# Altium PCB PCB1.PcbDoc
Units mil, origin at the board's own origin, x right, y up, seen from the top; angles counter-clockwise.
Board outline 4045 x 1495 mil, 2 copper layers (Top Layer, Bottom Layer); 17 components, 11 nets, 43 pads, 0 vias.
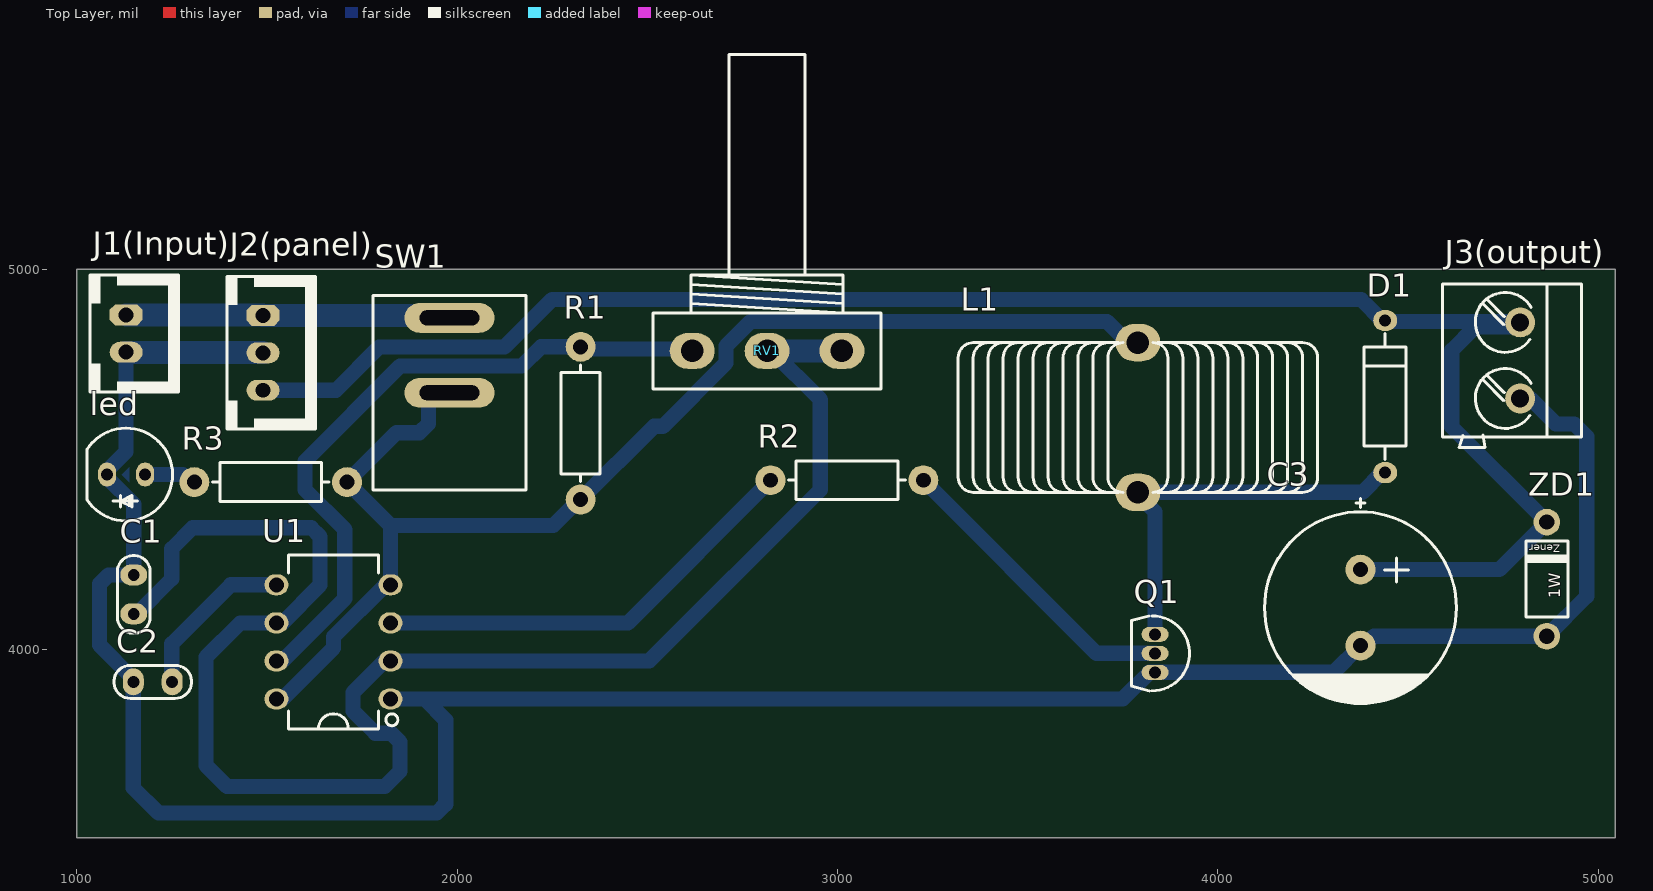
[diagram p0: Top Layer view]
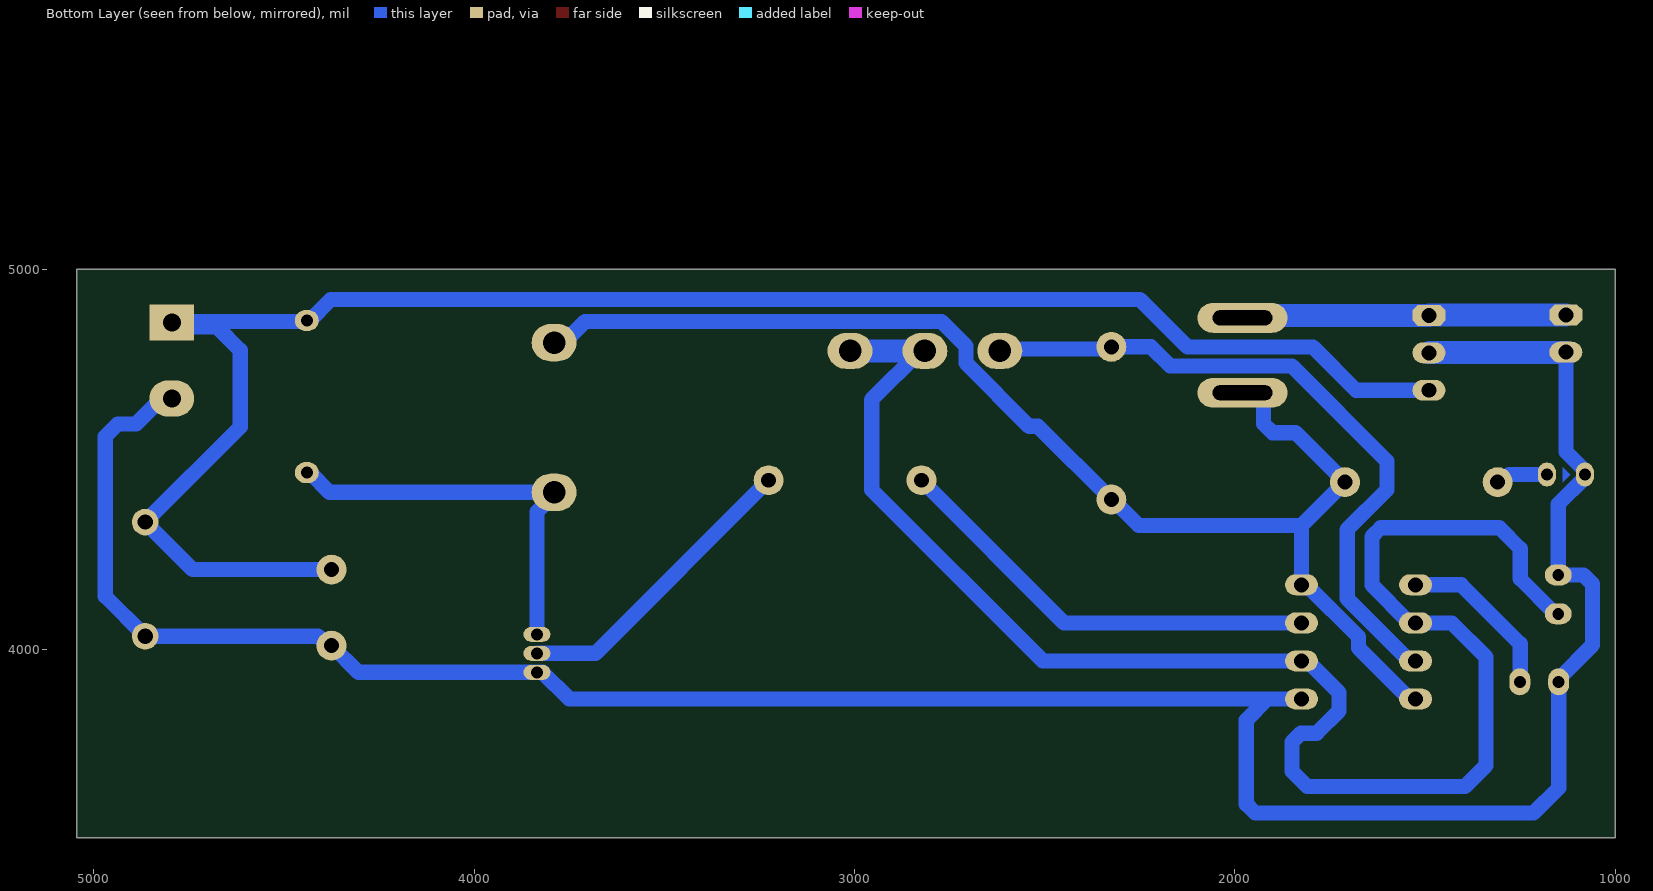
[diagram p1: Bottom Layer view, seen from below]
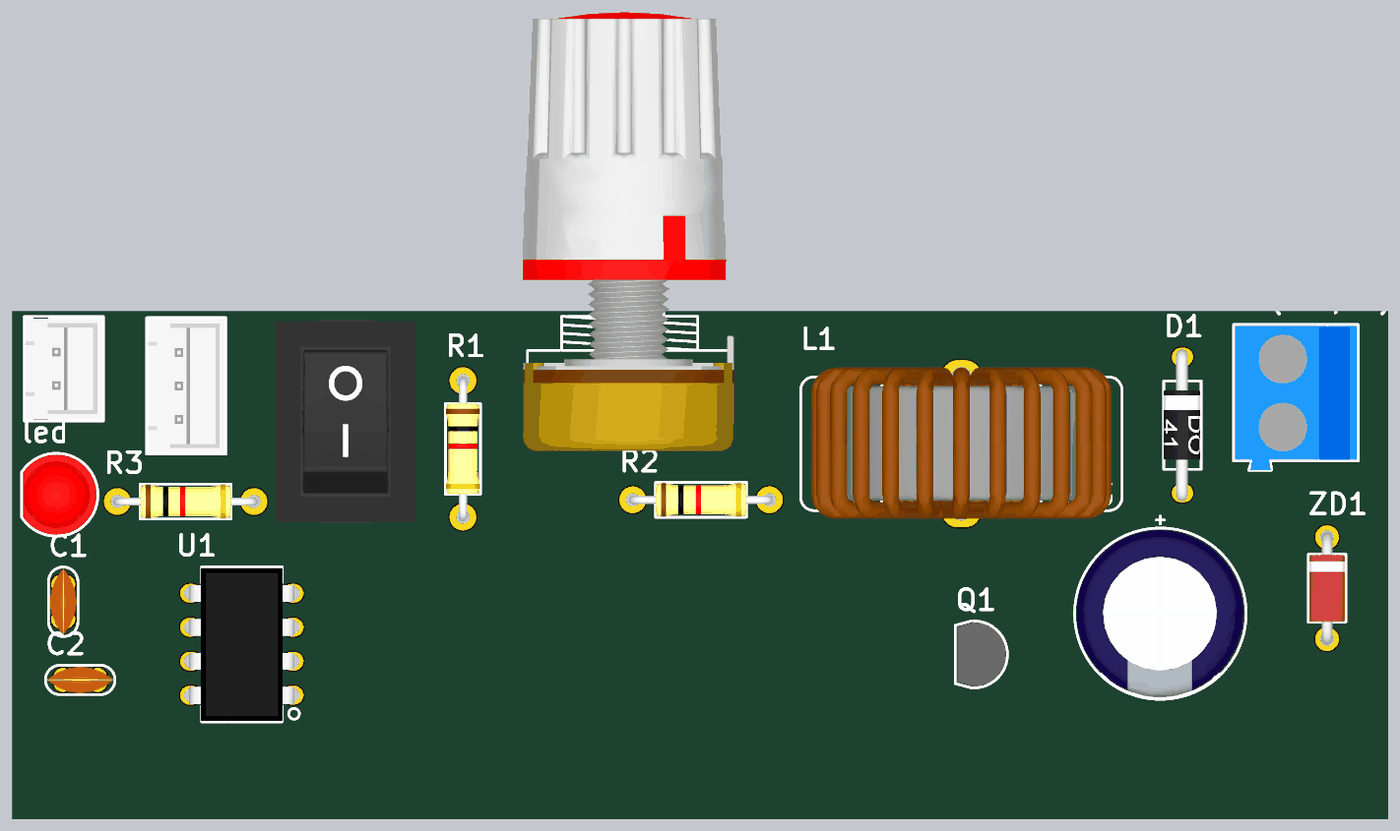
[diagram p2: 3D render of the assembled board from above, using the file's embedded part models]

## Layer stack, top to bottom
Top Solder: solder mask 0.4, Solder Resist, Dk 3.5
Top Layer: signal copper 1.4
Dielectric 1: dielectric 12.6, FR-4, Dk 4.8
Bottom Layer: signal copper 1.4
Bottom Solder: solder mask 0.4, Solder Resist, Dk 3.5

## Board outline
1000,3505 5045,3505 5045,5000 1000,5000

## Design rules (kind name [scope] priority, off if disabled: settings)
Clearance [All] p1: gap=10 ignorepadtopadclearanceinfootprint=FALSE
PolygonConnect [All] p1: connectstyle=Relief reliefconductorwidth=10 reliefentries=4 polygonreliefangle="90 Angle" airgapwidth=10
RoutingVias [All] p1: holewidth=28 width=50 viastyle="Through Hole" minholewidth=28 minwidth=50 maxholewidth=28 maxwidth=50
SolderMaskExpansion [All] p1: expansion=4 istentingtop=FALSE
Width [All] p1: maxlimit=60 minlimit=40 preferedwidth=50
30 further rules are at their usual default settings.

## Components (designator, comment, footprint, x,y, rotation, side; value= is the part's Value field where it differs from the comment)
C1 "470pF" C_CER_D5 1150,4145 r270 top
C2 "10nF" C_CER_D5 1200,3915 r0 top
C3 "0.1uF" C_EL_12X25 4375,4110 r270 top
D1 "1N4007" D_AX04_DO41 4440,4665 r90 top
J1(Input) "XH_2" XH_2 1130,4830.79 r270 top
J2(panel) "XH_3" XH_3 1490,4780 r270 top
J3(output) "CONN_TB2" TBB_2 4795,4760 r270 top
L1 "100uH" LTOR_25X10 3790,4610 r90 top
led "LED5MM_RED" LED5MM_RED 1130,4460 r180 top
Q1 "BC547" TO92_3 3835,3990 r270 top
R1 "1K" R025W_AX04 2325,4595 r270 top
R2 "330" R025W_AX04 3025,4445 r0 top
R3 "100" R025W_AX04 1510,4440 r0 top
RV1 "POT20K" VOL_R 2815,4785 r0 top
SW1 "ToggleSwitch" SWRCK_SPST_S_15X10 1980,4675 r270 top
U1 "LM555" DIP_8 1675,4020 r180 top
ZD1 "Diode Zener" "Diode 1W" 4865,4185 r90 top

## Footprints (in the part's own frame and the unit in brackets; to place one, negate y for a bottom-side part, rotate by r counter-clockwise, add the part's x,y. Pads: shape width x height; smd on the part's side, far side on the other; paste and mask are expansions set on the pad)
C_CER_D5 [mm] "CAP, CER, D:5mm, pitch: 2.5mm"
  oval 1.4x1.8 hole 0.8: 1(-1.3,0) 2(1.3,0)
  silkscreen extent -2.6,-1.1 2.6,1.1, body extent -2.46,-1 2.46,1, height 5.45
C_EL_12X25 [mm] "Cap Elec, D12.0X25.0H pitch: 5.0mm, RB.2/.5"
  round 2 hole 1: 1(-2.54,0) 2(2.54,0)
  silkscreen extent -7.3,-6.4 6.4,6.4, body extent -6.25,-6.27 6.25,6.21, height 25.8
D_AX04_DO41 [mm] "DIODE 0.4 INCH SPACING DO-41"
  oval 1.4x1.6 hole 0.8: 1(-5.08,0) 2(5.08,0)
  silkscreen extent -4.2,-1.4 4.2,1.4, body extent -5.68,-1.32 5.68,1.4, height 2.85
"Diode 1W" [mil]
  round 70 hole 40: 1(-150,0) 2(150,0)
  silkscreen extent -100,-55 100,55, body extent -166,-53 165,53, height 131
DIP_8 [mm] "DIP, pitch 2.54mm, 300mil Width"
  oval 1.6x1.4 / inner round 1.4 / far side oval 2.2x1.4 hole 1: 1(-3.81,3.81) 2(-3.81,1.27) 3(-3.81,-1.27) 4(-3.81,-3.81) 5(3.81,-3.81) 6(3.81,-1.27) 7(3.81,1.27) 8(3.81,3.81)
  silkscreen extent -4.3,-5.8 3,5.8, body extent -3.94,-5.7 3.94,5.73, height 4.19
LED5MM_RED [mm] "LED THD 5MM RED"
  oval 1.2x1.6 hole 0.8: 1(-1.27,0) 2(1.27,0)
  Bottom Layer region: -0.2,0.5 -0.2,-0.5 0.3,0
  silkscreen extent -3.1,-3.1 2.6,3.1, body extent -3,-3 2.5,3, height 9.14
LTOR_25X10 [mm] "INDUCTOR, TORIOD, 25.0X10.0mm"
  oval 2.5x3 hole 1.5: 1(-5,0) 2(5,0)
  silkscreen extent -5,-12 5,12, body extent -5.62,-11.21 5.7,11.21, height 23.03
R025W_AX04 [mm] "RESISTOR 1/4 WATT, AXIAL0.4"
  round 2 hole 1: 1(-5.1,0) 2(5.1,0)
  silkscreen extent -3.9,-1.3 3.9,1.3, body extent -5.38,-1.28 5.38,1.28, height 2.6
SWRCK_SPST_S_15X10 [mm] "SWITCH Rocker, SPST, Straight, 15x10"
  oval 2x6 hole 1 slot 4 at 90 deg: 1(-5,0) 2(0,0)
  silkscreen extent -6.5,-5.1 6.5,5.1, body extent -7.6,-5.25 7.6,5.25, height 13.1
TBB_2 [mm] "Terminal Block Blue"
  round 2 / inner round 2 / far side rect 2.4x3 hole 1.2: 1(-2.54,0)
  round 2 / inner round 2 / far side oval 2.4x3 hole 1.2: 2(2.54,0)
  silkscreen extent -5.1,-5.2 5.8,4.1, body extent -4.96,-5.08 5.78,3.99, height 12.52
TO92_3 [mm] "TO-92, SOT54"
  oval 1x1.8 hole 0.8 mask+0.1: 1(-1.27,0) 2(0,0) 3(1.27,0)
  silkscreen extent -2.5,-1.59 2.5,2.3, body extent -2.38,-1.45 2.38,2.18, height 7.82
VOL_R [mm] "VOULME RIGHT ANGLE"
  oval 3x2.4 hole 1.5: 1(-5,0) 2(0,0) 3(5,0)
  silkscreen extent -7.62,-2.54 7.62,19.78, body extent -10.76,-5 10.93,27.8, height 24.54
XH_2 [mm] "PW10-x-M, JST-BxB-XH-A pitch: 2.5mm, 3A/250v"
  oct 1.4x2.2 hole 1: 1(-1.25,0)
  oval 1.4x2.2 hole 1: 2(1.25,0)
  silkscreen extent -3.9,-2.4 3.9,3.5, body extent -3.75,-2.3 3.75,3.4, height 7
XH_3 [mm] "PW10-x-M, JST-BxB-XH-A pitch: 2.5mm, 3A/250v"
  oct 1.4x2.2 hole 1: 1(-2.5,0)
  oval 1.4x2.2 hole 1: 2(0,0) 3(2.5,0)
  silkscreen extent -5.1,-2.4 5.1,3.5, body extent -5,-2.3 5,3.4, height 7

## Part data
C1 C2: library part CAP_THD_CER, "CAP, THD, CER MULTI LAYER,", ASSEMBLY=ASSEMBLY, DESC="CAP, CER MULTI LAYER,", MANF=MANF, MANF_P#=MANF_PART#, PARAM2=50V, PRICE="100= 1$"
C3: library part CAP_THD_EL, "CAP, THD, ELEC,", ASSEMBLY=ASSEMBLY, DESC=DESCRIPTION, DIST#=MOUSER, MANF=MANF, MANF_P#=MANF_PART#, PARAM=20%, PARAM2=25V, PRICE="10= 5$"
D1: library part DIODE_THD, "DIODE, THD", ASSEMBLY=ASSEMBLY, DESC=DESCRIPTION, MANF=MANF, MANF_P#=1N4001, PARAM=100V, PARAM2=1A, PRICE=PRICE
J1(Input) J2(panel): "PW10-x-M, JST-BxB-XH-A pitch: 2.5mm, 3A/250v", MANF=JST, PARAM=3.0A, PARAM2=250v
  J1(Input): MANF_P#=B2B-XH-A
  J2(panel): MANF_P#=B3B-XH-A
J3(output): "CONN, TERMINAL BLOCK, 5.08mm pitch"
L1: library part IND_THD, "INDUCTOR, THD"
led: library part LED_THD_5MM_RED, "LED, THD, 5MM, RED", ASSEMBLY=ASSEMBLY, DESC=DESCRIPTION, MANF=MANF, MANF_P#=MANF_PART#, PARAM2=2.2V, PRICE=PRICE
Q1: library part NPN_BC547_TO92, "BJT, NPN, 45v, 0.1A, THD, TO92", MANF=FAIRCHILD, MANF_P#=BC547, PARAM="0.1A, Hfe110~800", PARAM2="45v, 500mW"
R1 R2 R3: library part RES_THD, "RESISTOR, THD", ASSEMBLY=ASSEMBLY, DESC=DESCRIPTION, DIST#=MOUSER, MANF="KOA SPEER", MANF_P#=RK73H1ETTP4701F, PARAM=0.063W, PARAM2=1%, PRICE="100= 0.5$"
RV1: library part RES_THD_POT_VOL, "RESISTOR, THD, Potentiometer Volume"
SW1: library part SWROK_SPST_R_15X10, "SWITCH, Rocker, SPST, THD, 15x10.5mm", ASSEMBLY=ASSEMBLY, DESC=DESCRIPTION, MANF=-, MANF_PART#=-, PARAM=-, PRICE=-
U1: library part LM555_DIP8, "555 Timer,", MANF="Fairchild, Texas Instruments", MANF_P#=LM555CN, PARAM="200mA output", PARAM2=4.5~16V
ZD1: "Zener Diode", Voltage="3.3 V", Company=E.P.I.L, Design Date=2011/11/02, Designer="Saeid Jorablo"

## Nets (pads, with @x,y where several pads share a name; then routed paths per layer and width w, separated by ;. In a path a pad name is that pad's centre, name@x,y a point inside that pad or via, vN(x,y) a via of type N, cw(c..) or ccw(c..) an arc to the next point about the centre after c; other vN are vias at no path point)
NetC1_1: C1.1 C2.1 C3.2 J1(Input).2 J2(panel).2 J3(output).2 led.2 Q1.3 U1.1 ZD1.1 | length 6719.7
  Bottom Layer w40: 1130,4781.57 1130,4519.83 1080,4469.83 led.2 1080,4452.13 1150,4382.13 C1.1 1083.43,4196.18 1060,4172.75 1060,4011.69 1148.82,3922.87 C2.1 1148.82,3636.18 1215,3570 1946.57,3570 1970,3593.43 1970,3815 1915,3870 ; U1.1 1915,3870 ; 4795,4660 4821.56,4660 4888.55,4593.01 4936.99,4593.01 4970,4560 4970,4140 ZD1.1 4410.48,4035 4385.48,4010 C3.2 4374.47,4010 4304.47,3940 Q1.3 3819.88,3940 3749.88,3870 1915,3870
  Bottom Layer w60: 1130,4781.57 1130.79,4780.79 1489.21,4780.79 1490,4780
NetC1_2: C1.2 RV1.2 RV1.3 U1.2 U1.6 | length 4326.6
  Bottom Layer w40: C1.2 1157.87,4093.82 1250,4185.94 1250,4265 1305,4320 1616.57,4320 1640,4296.57 1640,4169.25 1540.75,4070 U1.6 1430,4070 1340,3980 1340,3695 1395,3640 1810,3640 1850,3680 1850,3756.57 1826.57,3780 1785,3780 1726.57,3838.43 1726.57,3887.32 1809.25,3970 U1.2 2505,3970 2955,4420 2955,4656.81 2826.81,4785 RV1.2
  Bottom Layer w60: RV1.2@2826.81,4785 RV1.3
NetC2_2: C2.2 U1.5 | length 439.7
  Bottom Layer w40: C2.2 1250,3916.18 1250,4015 1405,4170 U1.5
NetC3_1: C3.1 D1.2 J2(panel).3 J3(output).1 ZD1.2 | length 4735.9
  Bottom Layer w40: 1490,4681.57 1681.57,4681.57 1795,4795 2125,4795 2250,4920 4376.97,4920 4431.97,4865 D1.2 4442.5,4862.5 4792.5,4862.5 4795,4860 4782.51,4847.51 4675.94,4847.51 4615,4786.57 4615,4585 ZD1.2 4740,4210 C3.1
NetD1_1: D1.1 L1.1 Q1.1 | length 1063.3
  Bottom Layer w40: Q1.1 3835,4362.18 3790,4407.18 L1.1 4380.12,4413.15 4431.97,4465 D1.1
NetJ1(Input)_1: J1(Input).1 J2(panel).1 SW1.1 | length 853.4
  Bottom Layer w60: 1130,4880 1130.79,4879.21 1489.21,4879.21 1490,4878.43 1889.61,4878.43 1896.19,4871.85 SW1.1
NetL1_2: L1.2 R1.2 R3.2 SW1.2 U1.4 U1.8 | length 3399.2
  Bottom Layer w40: U1.8 1540.75,3870 1675,4004.25 1675,4033.54 1811.46,4170 U1.4 1825,4325.79 ; SW1.2 1942.9,4675 1925,4657.1 1925,4593.43 1901.57,4570 1840.79,4570 R3.2 1825,4325.79 ; L1.2 3764.35,4806.85 3708.95,4862.24 2771.19,4862.24 2707.2,4798.26 2707.2,4753 2540.89,4586.69 2517.47,4586.69 R1.2 2321.32,4394.21 2252.89,4325.79 1825,4325.79
Netled_1: led.1 R3.1 | length 137.5
  Bottom Layer w40: led.1 1278.73,4460 1298.73,4440 R3.1
NetQ1_2: Q1.2 R2.2 | length 797.7
  Bottom Layer w40: R2.2 3680.79,3990 Q1.2
NetR1_1: R1.1 RV1.1 U1.7 | length 1799.5
  Bottom Layer w40: U1.7 1540.75,3970 1705,4134.25 1705,4315 1600,4420 1600,4495 1850,4745 2170,4745 2220.79,4795.79 R1.1 2330.39,4790.39 2612.76,4790.39 RV1.1
NetR2_1: R2.1 U1.3 | length 1154.5
  Bottom Layer w40: U1.3 2449.21,4070 R2.1

## Text inside footprints (layer, text, board x,y; h text height)
ZD1: Top Overlay "Zener" at 4900,4275 h19.68 r180; Top Overlay "1W" at 4900,4135 h30 r90